# EAGLE board BMS Adapter Fuse Holder rev1 (EAGLE 9.2.2)
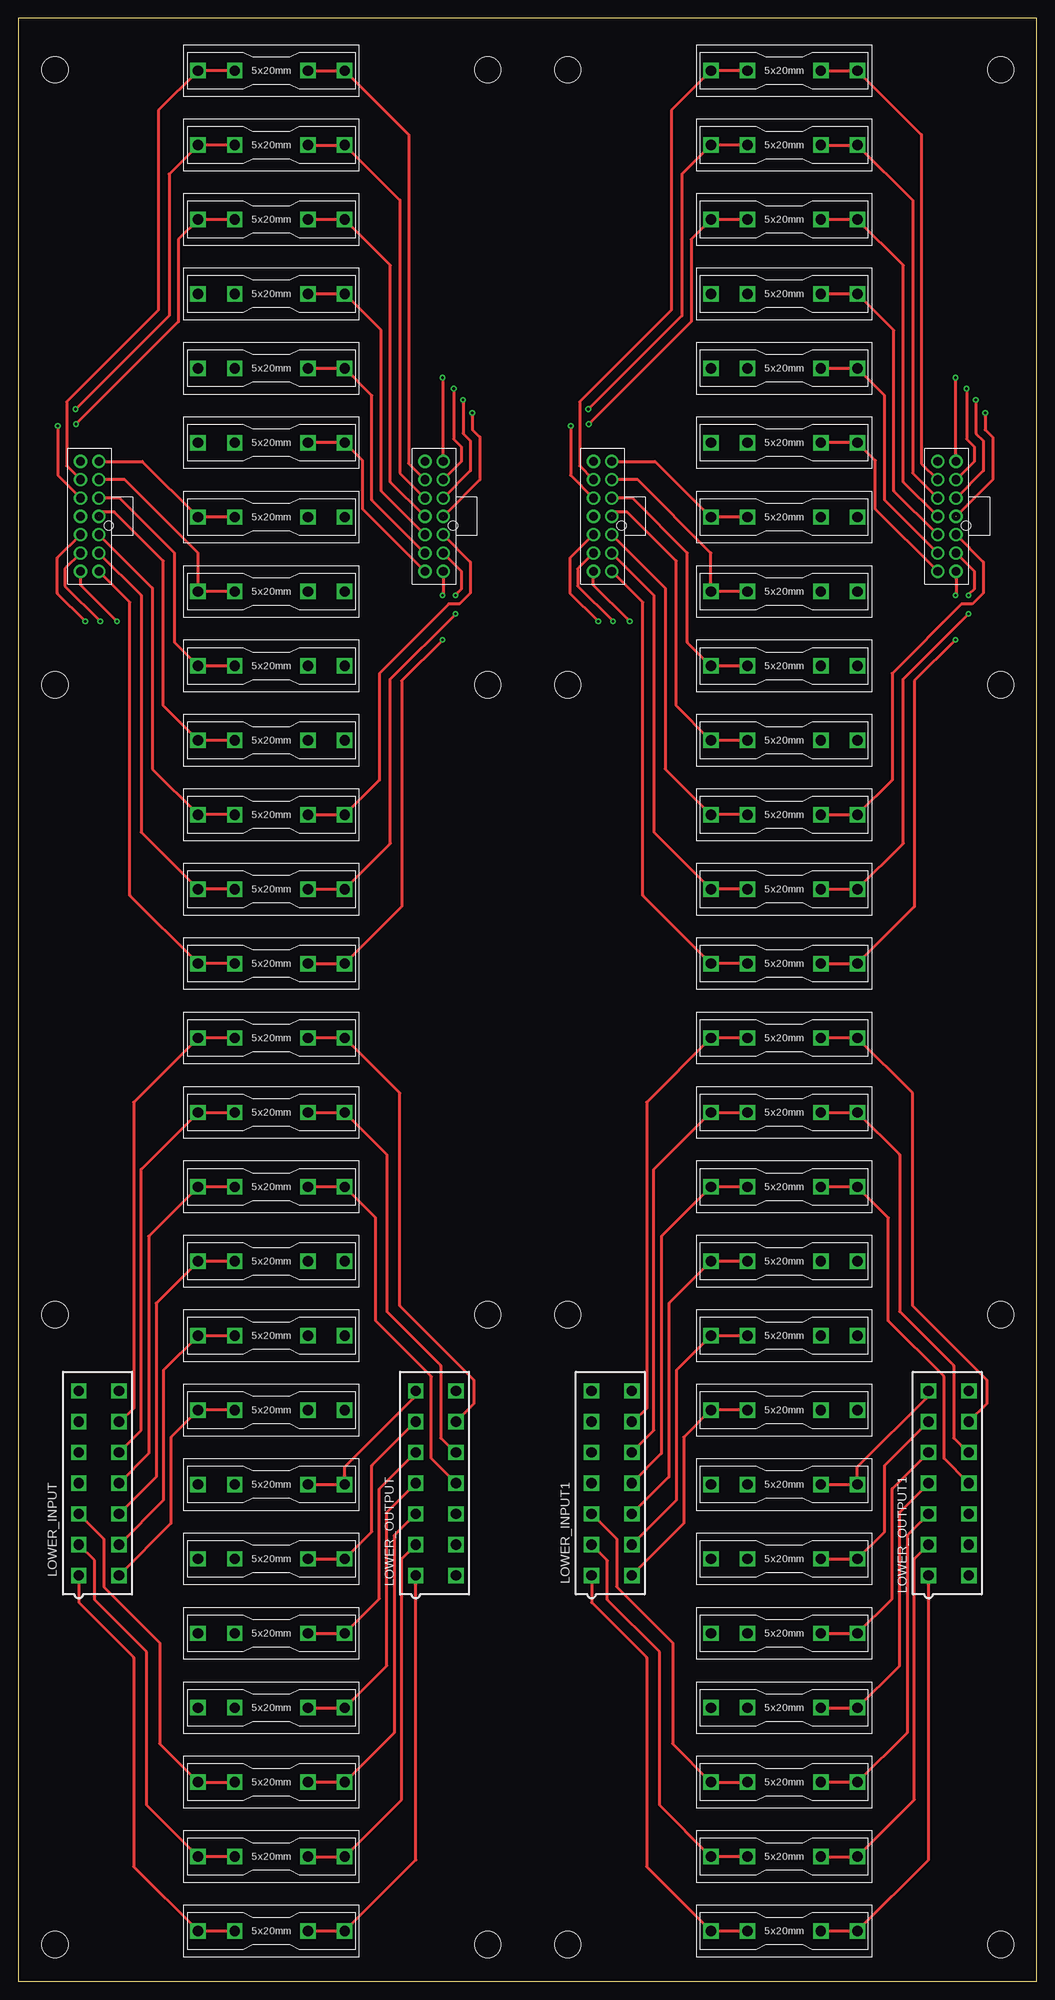
[diagram p0: board, top side]
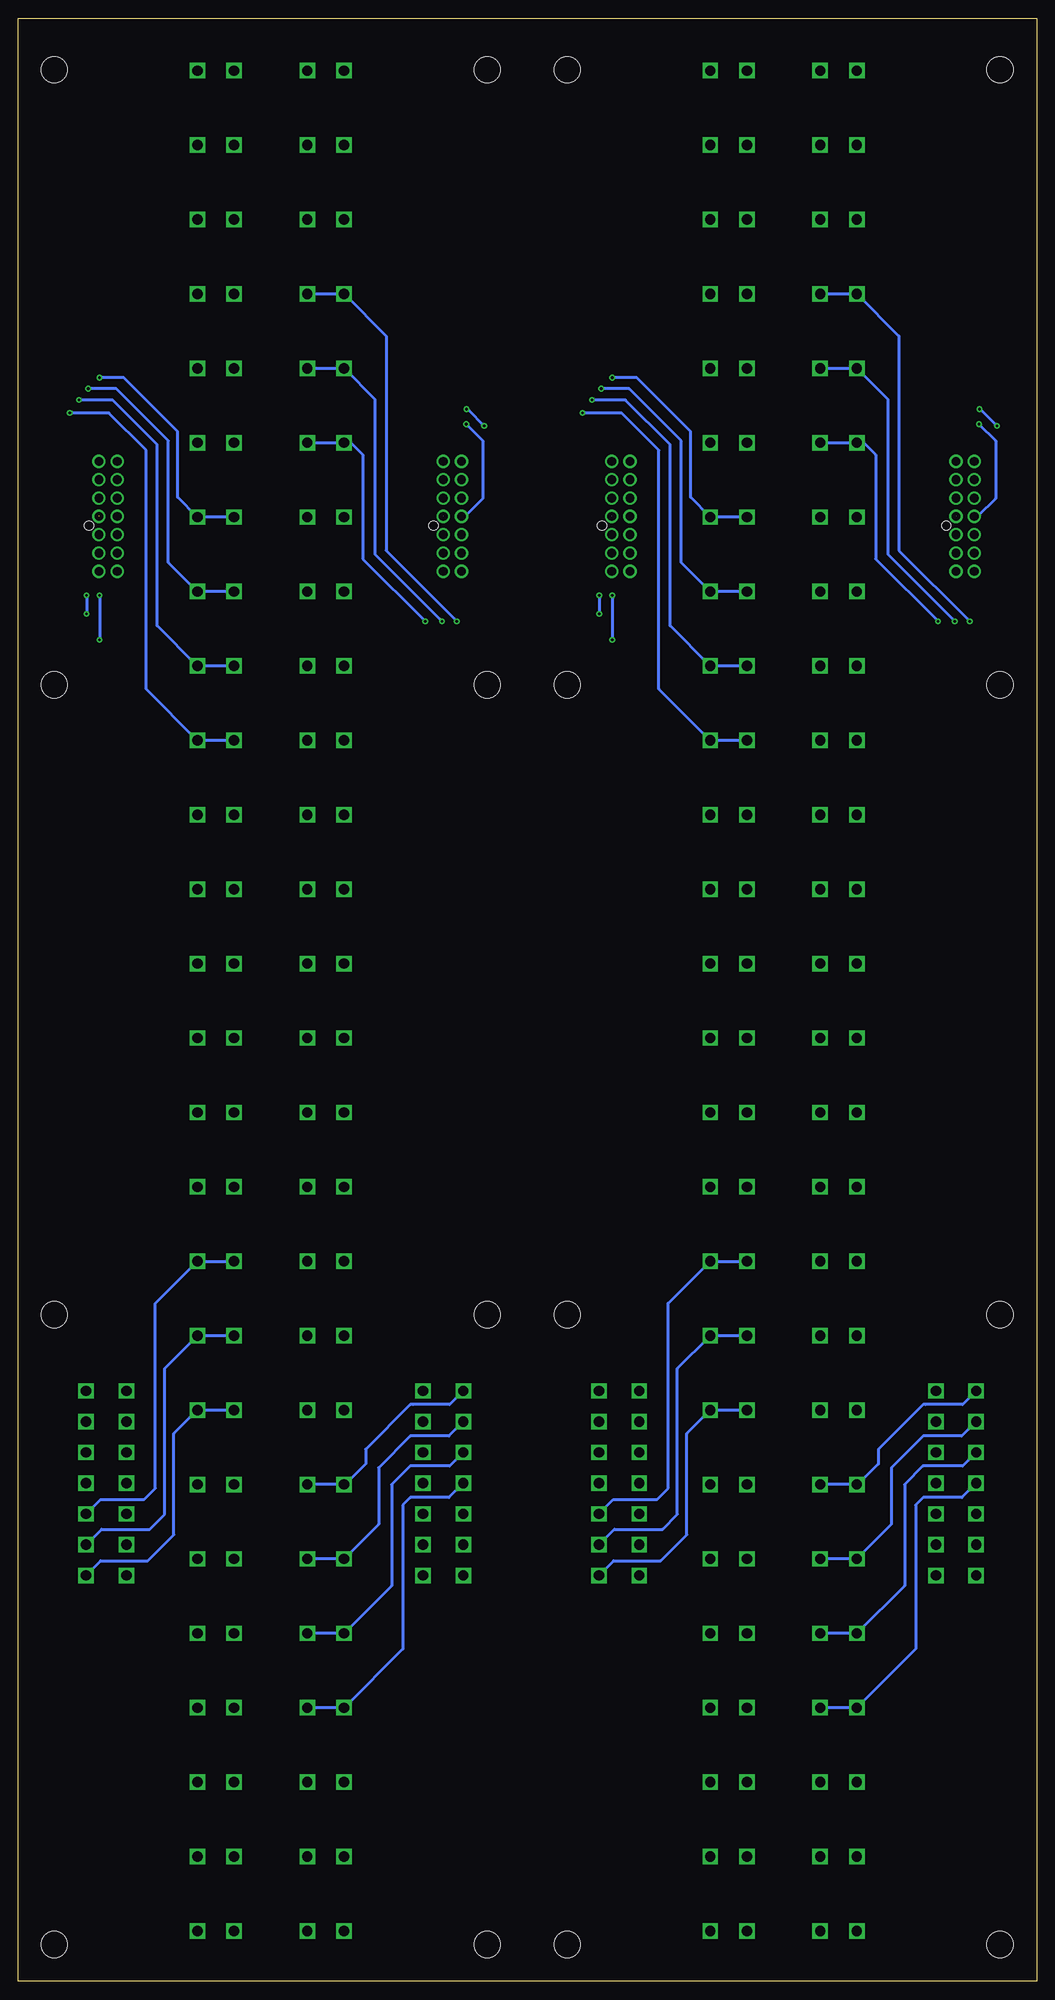
[diagram p1: board, bottom side, seen from below]

Size 139 x 268 mm. Coordinates in mm from the lower left corner, seen from the top.
Outline: 0,0 139,0 139,268 0,268 0,0
Copper layers (1*16): Top 0.035mm / dielectric 1.5mm / Bottom 0.035mm
Design rules "DRC Advanced Circuits *": minimum track width 6mil, minimum drill 15mil, track to track 24mil, track to pad 24mil, pad to pad 24mil, via to via 24mil, smd to smd 24mil, copper to edge 40mil, drill to drill 6mil, minimum pad ring 10mil, minimum via ring 8mil, stop-mask expansion 4mil, vias tented up to drill 0mil, thermal gap 10mil
Holes 3.6 mm at 5,261 64.09,261 5,5 64.09,177 64.09,91 64.09,5 5,91 5,177 75,261 134.09,261 75,5 134.09,177 134.09,91 134.09,5 75,91 75,177

## Footprints (pad centres in the part's own frame; a part is rotated, then mirrored left to right if it is on the bottom)
MINIFIT_5566-14 = drill 1.4 square: 1 12.6,-2.75; 2 8.4,-2.75; 3 4.2,-2.75; 4 0,-2.75; 5 -4.2,-2.75; 6 -8.4,-2.75; 7 -12.6,-2.75; 8 12.6,2.75; 9 8.4,2.75; 10 4.2,2.75; 11 0,2.75; 12 -4.2,2.75; 13 -8.4,2.75; 14 -12.6,2.75
0751.0110 = drill 1.4 square: L1 -10,0; L2 -5,0; R1 5,0; R2 10,0
NANO-FIT_VERTICAL-14 = drill 1.2: P$1 -7.5,0; P$2 -5,0; P$3 -2.5,0; P$4 0,0; P$5 2.5,0; P$6 5,0; P$7 7.5,0; P$8 -7.5,2.5; P$9 -5,2.5; P$10 -2.5,2.5; P$11 0,2.5; P$12 2.5,2.5; P$13 5,2.5; P$14 7.5,2.5 | hole 1.3: -1.27,-1.34

## Placement (x,y rotation side)
LOWER_INPUT  CONNECTOR-14  [MINIFIT_5566-14]  11,68 270 top
LOWER_INPUT1  CONNECTOR-14  [MINIFIT_5566-14]  81,68 270 top
LOWER_OUTPUT  CONNECTOR-14  [MINIFIT_5566-14]  57,68 270 top
LOWER_OUTPUT1  CONNECTOR-14  [MINIFIT_5566-14]  127,68 270 top
U$1  1A  [0751.0110]  34.54,6.86 180 top
U$2  1A  [0751.0110]  34.54,17.02 180 top
U$3  1A  [0751.0110]  34.54,27.18 180 top
U$4  1A  [0751.0110]  34.54,37.34 180 top
U$5  1A  [0751.0110]  34.54,47.5 180 top
U$6  1A  [0751.0110]  34.54,57.66 180 top
U$7  1A  [0751.0110]  34.54,67.82 180 top
U$8  1A  [0751.0110]  34.54,77.98 180 top
U$9  1A  [0751.0110]  34.54,88.14 180 top
U$10  1A  [0751.0110]  34.54,98.3 180 top
U$11  1A  [0751.0110]  34.54,108.46 180 top
U$12  1A  [0751.0110]  34.54,118.62 180 top
U$13  1A  [0751.0110]  34.54,128.78 180 top
U$14  1A  [0751.0110]  34.54,138.94 180 top
U$15  1A  [0751.0110]  34.54,149.1 180 top
U$16  1A  [0751.0110]  34.54,159.26 180 top
U$17  1A  [0751.0110]  34.54,169.42 180 top
U$18  1A  [0751.0110]  34.54,179.58 180 top
U$19  1A  [0751.0110]  34.54,189.74 180 top
U$20  1A  [0751.0110]  34.54,199.9 180 top
U$21  1A  [0751.0110]  34.54,210.06 180 top
U$22  1A  [0751.0110]  34.54,220.22 180 top
U$23  1A  [0751.0110]  34.54,230.38 180 top
U$24  1A  [0751.0110]  34.54,240.54 180 top
U$25  1A  [0751.0110]  34.54,250.7 180 top
U$26  1A  [0751.0110]  34.54,260.86 180 top
U$27  1A  [0751.0110]  104.54,6.86 180 top
U$28  1A  [0751.0110]  104.54,17.02 180 top
U$29  1A  [0751.0110]  104.54,27.18 180 top
U$30  1A  [0751.0110]  104.54,37.34 180 top
U$31  1A  [0751.0110]  104.54,47.5 180 top
U$32  1A  [0751.0110]  104.54,57.66 180 top
U$33  1A  [0751.0110]  104.54,67.82 180 top
U$34  1A  [0751.0110]  104.54,77.98 180 top
U$35  1A  [0751.0110]  104.54,88.14 180 top
U$36  1A  [0751.0110]  104.54,98.3 180 top
U$37  1A  [0751.0110]  104.54,108.46 180 top
U$38  1A  [0751.0110]  104.54,118.62 180 top
U$39  1A  [0751.0110]  104.54,128.78 180 top
U$40  1A  [0751.0110]  104.54,138.94 180 top
U$41  1A  [0751.0110]  104.54,149.1 180 top
U$42  1A  [0751.0110]  104.54,159.26 180 top
U$43  1A  [0751.0110]  104.54,169.42 180 top
U$44  1A  [0751.0110]  104.54,179.58 180 top
U$45  1A  [0751.0110]  104.54,189.74 180 top
U$46  1A  [0751.0110]  104.54,199.9 180 top
U$47  1A  [0751.0110]  104.54,210.06 180 top
U$48  1A  [0751.0110]  104.54,220.22 180 top
U$49  1A  [0751.0110]  104.54,230.38 180 top
U$50  1A  [0751.0110]  104.54,240.54 180 top
U$51  1A  [0751.0110]  104.54,250.7 180 top
U$52  1A  [0751.0110]  104.54,260.86 180 top
UPPER_INPUT  CONNECTOR-14NANO-FIT_VERTICAL-14  [NANO-FIT_VERTICAL-14]  11,200 90 top
UPPER_INPUT1  CONNECTOR-14NANO-FIT_VERTICAL-14  [NANO-FIT_VERTICAL-14]  81,200 90 top
UPPER_OUTPUT  CONNECTOR-14NANO-FIT_VERTICAL-14  [NANO-FIT_VERTICAL-14]  58,200 90 top
UPPER_OUTPUT1  CONNECTOR-14NANO-FIT_VERTICAL-14  [NANO-FIT_VERTICAL-14]  128,200 90 top

## Library data of the parts
LOWER_INPUT LOWER_INPUT1 LOWER_OUTPUT LOWER_OUTPUT1 U$1-U$52 UPPER_INPUT UPPER_INPUT1 UPPER_OUTPUT UPPER_OUTPUT1 = HyTechDevices

## Nets
N$1: LOWER_OUTPUT.1 U$1.L1 U$1.L2
N$2: LOWER_OUTPUT.2 U$2.L1 U$2.L2
N$3: LOWER_OUTPUT.3 U$3.L1 U$3.L2
N$4: LOWER_OUTPUT.4 U$4.L1 U$4.L2
N$5: LOWER_OUTPUT.5 U$5.L1 U$5.L2
N$6: LOWER_OUTPUT.6 U$6.L1 U$6.L2
N$7: LOWER_OUTPUT.7 U$7.L1 U$7.L2
N$8: LOWER_OUTPUT.8 U$8.L1 U$8.L2
N$9: LOWER_OUTPUT.9 U$9.L1 U$9.L2
N$10: LOWER_OUTPUT.10 U$10.L1 U$10.L2
N$11: LOWER_OUTPUT.11 U$11.L1 U$11.L2
N$12: LOWER_OUTPUT.12 U$12.L1 U$12.L2
N$13: LOWER_OUTPUT.13 U$13.L1 U$13.L2
N$14: U$14.L1 U$14.L2 UPPER_OUTPUT.P$1
N$15: U$15.L1 U$15.L2 UPPER_OUTPUT.P$2
N$16: U$16.L1 U$16.L2 UPPER_OUTPUT.P$3
N$17: U$17.L1 U$17.L2 UPPER_OUTPUT.P$4
N$18: U$18.L1 U$18.L2 UPPER_OUTPUT.P$5
N$19: U$19.L1 U$19.L2 UPPER_OUTPUT.P$6
N$20: U$20.L1 U$20.L2 UPPER_OUTPUT.P$7
N$21: U$21.L1 U$21.L2 UPPER_OUTPUT.P$8
N$23: U$22.L1 U$22.L2 UPPER_OUTPUT.P$9
N$24: U$23.L1 U$23.L2 UPPER_OUTPUT.P$10
N$25: U$24.L1 U$24.L2 UPPER_OUTPUT.P$11
N$26: U$25.L1 U$25.L2 UPPER_OUTPUT.P$12
N$27: U$26.L1 U$26.L2 UPPER_OUTPUT.P$13
N$28: LOWER_OUTPUT1.1 U$27.L1 U$27.L2
N$29: LOWER_INPUT.1 U$1.R1 U$1.R2
N$30: LOWER_INPUT.2 U$2.R1 U$2.R2
N$31: LOWER_INPUT.3 U$3.R1 U$3.R2
N$32: LOWER_INPUT.4 U$4.R1 U$4.R2
N$33: LOWER_INPUT.5 U$5.R1 U$5.R2
N$34: LOWER_INPUT.6 U$6.R1 U$6.R2
N$35: LOWER_INPUT.7 U$7.R1 U$7.R2
N$36: LOWER_INPUT.8 U$8.R1 U$8.R2
N$37: LOWER_INPUT.9 U$9.R1 U$9.R2
N$38: LOWER_INPUT.10 U$10.R1 U$10.R2
N$39: LOWER_INPUT.11 U$11.R1 U$11.R2
N$40: LOWER_INPUT.12 U$12.R1 U$12.R2
N$41: LOWER_INPUT.13 U$13.R1 U$13.R2
N$42: U$14.R1 U$14.R2 UPPER_INPUT.P$1
N$43: U$15.R1 U$15.R2 UPPER_INPUT.P$2
N$44: U$16.R1 U$16.R2 UPPER_INPUT.P$3
N$45: U$17.R1 U$17.R2 UPPER_INPUT.P$4
N$46: U$18.R1 U$18.R2 UPPER_INPUT.P$5
N$47: U$19.R1 U$19.R2 UPPER_INPUT.P$6
N$48: U$20.R1 U$20.R2 UPPER_INPUT.P$7
N$49: U$21.R1 U$21.R2 UPPER_INPUT.P$8
N$50: U$22.R1 U$22.R2 UPPER_INPUT.P$9
N$51: U$23.R1 U$23.R2 UPPER_INPUT.P$10
N$52: U$24.R1 U$24.R2 UPPER_INPUT.P$11
N$53: U$25.R1 U$25.R2 UPPER_INPUT.P$12
N$54: U$26.R1 U$26.R2 UPPER_INPUT.P$13
N$55: LOWER_OUTPUT1.2 U$28.L1 U$28.L2
N$56: LOWER_OUTPUT1.3 U$29.L1 U$29.L2
N$57: LOWER_OUTPUT1.4 U$30.L1 U$30.L2
N$58: LOWER_OUTPUT1.5 U$31.L1 U$31.L2
N$59: LOWER_OUTPUT1.6 U$32.L1 U$32.L2
N$60: LOWER_OUTPUT1.7 U$33.L1 U$33.L2
N$61: LOWER_OUTPUT1.8 U$34.L1 U$34.L2
N$62: LOWER_OUTPUT1.9 U$35.L1 U$35.L2
N$63: LOWER_OUTPUT1.10 U$36.L1 U$36.L2
N$64: LOWER_OUTPUT1.11 U$37.L1 U$37.L2
N$65: LOWER_OUTPUT1.12 U$38.L1 U$38.L2
N$66: LOWER_OUTPUT1.13 U$39.L1 U$39.L2
N$67: U$40.L1 U$40.L2 UPPER_OUTPUT1.P$1
N$68: U$41.L1 U$41.L2 UPPER_OUTPUT1.P$2
N$69: U$42.L1 U$42.L2 UPPER_OUTPUT1.P$3
N$70: U$43.L1 U$43.L2 UPPER_OUTPUT1.P$4
N$71: U$44.L1 U$44.L2 UPPER_OUTPUT1.P$5
N$72: U$45.L1 U$45.L2 UPPER_OUTPUT1.P$6
N$73: U$46.L1 U$46.L2 UPPER_OUTPUT1.P$7
N$74: U$47.L1 U$47.L2 UPPER_OUTPUT1.P$8
N$75: U$48.L1 U$48.L2 UPPER_OUTPUT1.P$9
N$76: U$49.L1 U$49.L2 UPPER_OUTPUT1.P$10
N$77: U$50.L1 U$50.L2 UPPER_OUTPUT1.P$11
N$78: U$51.L1 U$51.L2 UPPER_OUTPUT1.P$12
N$79: U$52.L1 U$52.L2 UPPER_OUTPUT1.P$13
N$80: LOWER_INPUT1.1 U$27.R1 U$27.R2
N$81: LOWER_INPUT1.2 U$28.R1 U$28.R2
N$82: LOWER_INPUT1.3 U$29.R1 U$29.R2
N$83: LOWER_INPUT1.4 U$30.R1 U$30.R2
N$84: LOWER_INPUT1.5 U$31.R1 U$31.R2
N$85: LOWER_INPUT1.6 U$32.R1 U$32.R2
N$86: LOWER_INPUT1.7 U$33.R1 U$33.R2
N$87: LOWER_INPUT1.8 U$34.R1 U$34.R2
N$88: LOWER_INPUT1.9 U$35.R1 U$35.R2
N$89: LOWER_INPUT1.10 U$36.R1 U$36.R2
N$90: LOWER_INPUT1.11 U$37.R1 U$37.R2
N$91: LOWER_INPUT1.12 U$38.R1 U$38.R2
N$92: LOWER_INPUT1.13 U$39.R1 U$39.R2
N$93: U$40.R1 U$40.R2 UPPER_INPUT1.P$1
N$94: U$41.R1 U$41.R2 UPPER_INPUT1.P$2
N$95: U$42.R1 U$42.R2 UPPER_INPUT1.P$3
N$96: U$43.R1 U$43.R2 UPPER_INPUT1.P$4
N$97: U$44.R1 U$44.R2 UPPER_INPUT1.P$5
N$98: U$45.R1 U$45.R2 UPPER_INPUT1.P$6
N$99: U$46.R1 U$46.R2 UPPER_INPUT1.P$7
N$100: U$47.R1 U$47.R2 UPPER_INPUT1.P$8
N$101: U$48.R1 U$48.R2 UPPER_INPUT1.P$9
N$102: U$49.R1 U$49.R2 UPPER_INPUT1.P$10
N$103: U$50.R1 U$50.R2 UPPER_INPUT1.P$11
N$104: U$51.R1 U$51.R2 UPPER_INPUT1.P$12
N$105: U$52.R1 U$52.R2 UPPER_INPUT1.P$13

## Tracks (layer width: path | path; a pad name or v marks a point on that pad's centre or on a via)
N$1
  Top 0.406: U$1.L2 U$1.L1 54.25,16.56 LOWER_OUTPUT.1
N$2
  Top 0.406: U$2.L2 U$2.L1 52.32,24.8 52.32,57.67 LOWER_OUTPUT.2
N$3
  Top 0.406: LOWER_OUTPUT.3 51.31,60.86 51.31,33.94 U$3.L1 U$3.L2
N$4
  Top 0.406: U$4.L2 U$4.L1 50.29,43.08 50.29,64.04 LOWER_OUTPUT.4
N$5
  Top 0.406: U$5.L2 U$5.L1 49.28,52.23 49.28,67.23 LOWER_OUTPUT.5
N$6
  Top 0.406: U$6.L2 U$6.L1 48.26,61.37 48.26,70.41 LOWER_OUTPUT.6
N$7
  Top 0.406: U$7.L2 U$7.L1 44.54,70.2 54.25,79.9 LOWER_OUTPUT.7
N$8
  Bottom 0.406: LOWER_OUTPUT.8 57.75,57.4 51.31,57.4 47.75,60.96 47.75,74.77 U$8.L1 U$8.L2
N$9
  Bottom 0.406: U$9.L2 U$9.L1 49.02,83.66 49.02,63.75 51.05,61.72 57.63,61.72 LOWER_OUTPUT.9
N$10
  Bottom 0.406: LOWER_OUTPUT.10 57.77,65.78 51.82,65.78 50.29,67.31 50.29,92.55 U$10.L1 U$10.L2
N$11
  Top 0.406: LOWER_OUTPUT.11 56.39,71.36 56.39,82.55 48.77,90.17 48.77,104.23 U$11.L1 U$11.L2
N$12
  Top 0.406: U$12.L2 U$12.L1 50.29,112.87 50.29,91.44 57.66,84.07 57.66,74.17 59.62,72.2 LOWER_OUTPUT.12
N$13
  Top 0.406: LOWER_OUTPUT.13 62.23,78.88 62.23,82.04 52.07,92.2 52.07,121.25 U$13.L1 U$13.L2
N$14  (via drill 0.38)
  Top 0.406: U$14.L2 U$14.L1 52.32,146.72 52.32,177.54 v57.91,183.13 | UPPER_OUTPUT.P$1 58,189.32 v57.91,189.23
  Bottom 0.406: v57.91,189.23 v57.91,183.13
N$15  (via drill 0.38)
  Top 0.406: U$15.L2 U$15.L1 50.8,155.35 50.8,177.8 v59.69,186.69 | UPPER_OUTPUT.P$2 60.45,192.55 60.45,190.06 59.69,189.3 v59.69,189.23
  Bottom 0.406: v59.69,189.23 v59.69,186.69
N$16
  Top 0.406: U$16.L2 U$16.L1 49.28,163.99 49.28,178.56 58.74,188.02 60.19,188.02 61.72,189.55 61.72,193.78 UPPER_OUTPUT.P$3
N$17  (via drill 0.38)  (1 unrouted)
  Top 0.406: v61.98,214.12 61.98,211.83 62.99,210.82 62.99,204.99 58.6,200.6 58.57,200.6 57.98,200.02
  Bottom 0.406: U$17.L2 U$17.L1 51.56,176.43 51.56,209.04 56.64,214.12 v61.98,214.12
N$18  (via drill 0.38)
  Top 0.406: v60.71,215.9 60.71,211.33 61.72,210.31 61.72,206.22 UPPER_OUTPUT.P$5
  Bottom 0.406: U$18.L2 U$18.L1 50.04,185.07 50.04,209.8 56.13,215.9 v60.71,215.9
N$19  (via drill 0.38)
  Top 0.406: v59.44,217.42 59.44,210.56 60.45,209.55 60.45,207.45 UPPER_OUTPUT.P$6
  Bottom 0.406: U$19.L2 U$19.L1 48.51,193.71 48.51,210.31 55.63,217.42 v59.44,217.42
N$20  (via drill 0.38)
  Top 0.406: v57.91,218.95 57.91,207.59 UPPER_OUTPUT.P$7
  Bottom 0.406: U$20.L2 U$20.L1 47.24,202.6 47.24,211.58 54.61,218.95 v57.91,218.95
N$21
  Top 0.406: UPPER_OUTPUT.P$8 46.99,201.01 46.99,207.61 U$21.L1 U$21.L2
N$23
  Top 0.406: UPPER_OUTPUT.P$9 48.26,202.24 48.26,216.5 U$22.L1 U$22.L2
N$24
  Top 0.406: UPPER_OUTPUT.P$10 49.53,203.47 49.53,225.39 U$23.L1 U$23.L2
N$25
  Top 0.406: UPPER_OUTPUT.P$11 50.8,204.7 50.8,234.28 U$24.L1 U$24.L2
N$26
  Top 0.406: U$25.L2 U$25.L1 52.07,243.17 52.07,205.93 UPPER_OUTPUT.P$12
N$27
  Top 0.406: U$26.L2 U$26.L1 53.28,252.12 53.28,207.22 UPPER_OUTPUT.P$13
N$28
  Top 0.406: U$27.L2 U$27.L1 124.25,16.56 LOWER_OUTPUT1.1
N$29
  Top 0.406: LOWER_INPUT.1 8.25,51.69 15.75,44.19 15.75,15.65 U$1.R2 U$1.R1
N$30
  Top 0.406: U$2.R1 U$2.R2 17.53,24.03 17.53,44.96 10.41,52.07 10.41,57.44 LOWER_INPUT.2
N$31
  Top 0.406: LOWER_INPUT.3 11.68,60.37 11.68,53.85 19.3,46.23 19.3,32.42 U$3.R2 U$3.R1
N$32
  Bottom 0.406: LOWER_INPUT.4 10.21,66.04 15.49,66.04 16.51,65.02 16.51,45.37 U$4.R2 U$4.R1
N$33
  Bottom 0.406: LOWER_INPUT.5 10.11,70.34 15.51,70.34 18.03,67.82 18.03,54.01 U$5.R2 U$5.R1
N$34
  Bottom 0.406: LOWER_INPUT.6 10.23,74.42 15.49,74.42 19.81,70.1 19.81,62.39 U$6.R2 U$6.R1
N$35
  Bottom 0.406: LOWER_INPUT.7 10.11,78.74 15.14,78.74 15.49,78.74 21.59,72.64 21.59,70.61 24.38,67.82 U$7.R2 U$7.R1
N$36
  Top 0.406: U$8.R1 U$8.R2 20.83,74.26 20.83,62.48 LOWER_INPUT.8
N$37
  Top 0.406: U$9.R1 U$9.R2 19.81,83.4 19.81,65.66 LOWER_INPUT.9
N$38
  Top 0.406: U$10.R1 U$10.R2 18.8,92.55 18.8,68.85 LOWER_INPUT.10
N$39
  Top 0.406: U$11.R1 U$11.R2 17.78,101.69 17.78,72.03 LOWER_INPUT.11
N$40
  Top 0.406: LOWER_INPUT.12 16.76,75.21 16.76,110.84 U$12.R2 U$12.R1
N$41
  Top 0.406: U$13.R1 U$13.R2 15.75,119.98 15.75,78.23 13.92,76.4 LOWER_INPUT.13
N$42
  Top 0.406: U$14.R1 U$14.R2 15.24,148.24 15.24,188.26 UPPER_INPUT.P$1
N$43
  Top 0.406: UPPER_INPUT.P$2 16.76,189.24 16.76,156.88 U$15.R2 U$15.R1
N$44
  Top 0.406: UPPER_INPUT.P$3 18.29,190.21 18.29,165.51 U$16.R2 U$16.R1
N$45  (1 unrouted)
  Top 0.406: U$17.R1 U$17.R2 19.81,174.15 19.81,193.9 13.11,200.6 11.57,200.6 10.98,200.02
N$46
  Top 0.406: U$18.R1 U$18.R2 21.34,182.78 21.34,195 13.84,202.5 UPPER_INPUT.P$5
N$47
  Top 0.406: U$19.R1 U$19.R2 24.54,195.01 14.56,205 UPPER_INPUT.P$6
N$48
  Top 0.406: UPPER_INPUT.P$7 16.94,207.5 U$20.R2 U$20.R1
N$49  (via drill 0.38)
  Top 0.406: v13.46,185.67 8.5,190.63 UPPER_INPUT.P$8
  Bottom 0.406: U$21.R1 U$21.R2 23.62,210.06 21.97,208.41 21.97,194.18 v13.46,185.67
N$50  (via drill 0.38)
  Top 0.406: UPPER_INPUT.P$9 6.35,192.85 6.35,190.5 v11.18,185.67
  Bottom 0.406: U$22.R1 U$22.R2 20.32,215.99 20.32,194.82 v11.18,185.67
N$51  (via drill 0.38)
  Top 0.406: v9.14,185.67 5.33,189.48 5.33,194.33 UPPER_INPUT.P$10
  Bottom 0.406: U$23.R1 U$23.R2 18.8,224.63 18.8,195.32 v9.14,185.67
N$52  (via drill 0.38)
  Top 0.406: U$24.R1 U$24.R2 21.84,237.84 21.84,226.57 v7.87,212.6
  Bottom 0.406: v7.87,212.6 5.59,210.31 5.59,202.44 8.02,200 UPPER_INPUT.P$11
N$53  (via drill 0.38)
  Top 0.406: v7.81,214.63 20.57,227.39 20.57,246.73 U$25.R2 U$25.R1 | v5.4,212.34 5.4,205.6 UPPER_INPUT.P$12
  Bottom 0.406: v7.81,214.63 7.68,214.63 v5.4,212.34
N$54
  Top 0.406: UPPER_INPUT.P$13 6.6,206.9 6.6,215.64 19.13,228.17 19.13,255.44 U$26.R2 U$26.R1
N$55
  Top 0.406: U$28.L2 U$28.L1 122.32,24.8 122.32,57.67 LOWER_OUTPUT1.2
N$56
  Top 0.406: LOWER_OUTPUT1.3 121.31,60.86 121.31,33.94 U$29.L1 U$29.L2
N$57
  Top 0.406: U$30.L2 U$30.L1 120.29,43.08 120.29,64.04 LOWER_OUTPUT1.4
N$58
  Top 0.406: U$31.L2 U$31.L1 119.28,52.23 119.28,67.23 LOWER_OUTPUT1.5
N$59
  Top 0.406: U$32.L2 U$32.L1 118.26,61.37 118.26,70.41 LOWER_OUTPUT1.6
N$60
  Top 0.406: U$33.L2 U$33.L1 114.54,70.2 124.25,79.9 LOWER_OUTPUT1.7
N$61
  Bottom 0.406: LOWER_OUTPUT1.8 127.75,57.4 121.31,57.4 117.75,60.96 117.75,74.77 U$34.L1 U$34.L2
N$62
  Bottom 0.406: U$35.L2 U$35.L1 119.02,83.66 119.02,63.75 121.05,61.72 127.63,61.72 LOWER_OUTPUT1.9
N$63
  Bottom 0.406: LOWER_OUTPUT1.10 127.77,65.78 121.82,65.78 120.29,67.31 120.29,92.55 U$36.L1 U$36.L2
N$64
  Top 0.406: LOWER_OUTPUT1.11 126.39,71.36 126.39,82.55 118.77,90.17 118.77,104.23 U$37.L1 U$37.L2
N$65
  Top 0.406: U$38.L2 U$38.L1 120.29,112.87 120.29,91.44 127.66,84.07 127.66,74.17 129.62,72.2 LOWER_OUTPUT1.12
N$66
  Top 0.406: LOWER_OUTPUT1.13 132.23,78.88 132.23,82.04 122.07,92.2 122.07,121.25 U$39.L1 U$39.L2
N$67  (via drill 0.38)
  Top 0.406: U$40.L2 U$40.L1 122.32,146.72 122.32,177.54 v127.91,183.13 | UPPER_OUTPUT1.P$1 128,189.32 v127.91,189.23
  Bottom 0.406: v127.91,189.23 v127.91,183.13
N$68  (via drill 0.38)
  Top 0.406: U$41.L2 U$41.L1 120.8,155.35 120.8,177.8 v129.69,186.69 | UPPER_OUTPUT1.P$2 130.45,192.55 130.45,190.06 129.69,189.3 v129.69,189.23
  Bottom 0.406: v129.69,189.23 v129.69,186.69
N$69
  Top 0.406: U$42.L2 U$42.L1 119.28,163.99 119.28,178.56 128.74,188.02 130.19,188.02 131.72,189.55 131.72,193.78 UPPER_OUTPUT1.P$3
N$70  (via drill 0.38)  (1 unrouted)
  Top 0.406: v131.98,214.12 131.98,211.83 132.99,210.82 132.99,204.99 128.6,200.6 128.57,200.6 127.98,200.02
  Bottom 0.406: U$43.L2 U$43.L1 121.56,176.43 121.56,209.04 126.64,214.12 v131.98,214.12
N$71  (via drill 0.38)
  Top 0.406: v130.71,215.9 130.71,211.33 131.72,210.31 131.72,206.22 UPPER_OUTPUT1.P$5
  Bottom 0.406: U$44.L2 U$44.L1 120.04,185.07 120.04,209.8 126.13,215.9 v130.71,215.9
N$72  (via drill 0.38)
  Top 0.406: v129.44,217.42 129.44,210.56 130.45,209.55 130.45,207.45 UPPER_OUTPUT1.P$6
  Bottom 0.406: U$45.L2 U$45.L1 118.51,193.71 118.51,210.31 125.63,217.42 v129.44,217.42
N$73  (via drill 0.38)
  Top 0.406: v127.91,218.95 127.91,207.59 UPPER_OUTPUT1.P$7
  Bottom 0.406: U$46.L2 U$46.L1 117.24,202.6 117.24,211.58 124.61,218.95 v127.91,218.95
N$74
  Top 0.406: UPPER_OUTPUT1.P$8 116.99,201.01 116.99,207.61 U$47.L1 U$47.L2
N$75
  Top 0.406: UPPER_OUTPUT1.P$9 118.26,202.24 118.26,216.5 U$48.L1 U$48.L2
N$76
  Top 0.406: UPPER_OUTPUT1.P$10 119.53,203.47 119.53,225.39 U$49.L1 U$49.L2
N$77
  Top 0.406: UPPER_OUTPUT1.P$11 120.8,204.7 120.8,234.28 U$50.L1 U$50.L2
N$78
  Top 0.406: U$51.L2 U$51.L1 122.07,243.17 122.07,205.93 UPPER_OUTPUT1.P$12
N$79
  Top 0.406: U$52.L2 U$52.L1 123.28,252.12 123.28,207.22 UPPER_OUTPUT1.P$13
N$80
  Top 0.406: LOWER_INPUT1.1 78.25,51.69 85.75,44.19 85.75,15.65 U$27.R2 U$27.R1
N$81
  Top 0.406: U$28.R1 U$28.R2 87.53,24.03 87.53,44.96 80.41,52.07 80.41,57.44 LOWER_INPUT1.2
N$82
  Top 0.406: LOWER_INPUT1.3 81.68,60.37 81.68,53.85 89.3,46.23 89.3,32.42 U$29.R2 U$29.R1
N$83
  Bottom 0.406: LOWER_INPUT1.4 80.21,66.04 85.49,66.04 86.51,65.02 86.51,45.37 U$30.R2 U$30.R1
N$84
  Bottom 0.406: LOWER_INPUT1.5 80.11,70.34 85.51,70.34 88.03,67.82 88.03,54.01 U$31.R2 U$31.R1
N$85
  Bottom 0.406: LOWER_INPUT1.6 80.23,74.42 85.49,74.42 89.81,70.1 89.81,62.39 U$32.R2 U$32.R1
N$86
  Bottom 0.406: LOWER_INPUT1.7 80.11,78.74 85.14,78.74 85.49,78.74 91.59,72.64 91.59,70.61 94.38,67.82 U$33.R2 U$33.R1
N$87
  Top 0.406: U$34.R1 U$34.R2 90.83,74.26 90.83,62.48 LOWER_INPUT1.8
N$88
  Top 0.406: U$35.R1 U$35.R2 89.81,83.4 89.81,65.66 LOWER_INPUT1.9
N$89
  Top 0.406: U$36.R1 U$36.R2 88.8,92.55 88.8,68.85 LOWER_INPUT1.10
N$90
  Top 0.406: U$37.R1 U$37.R2 87.78,101.69 87.78,72.03 LOWER_INPUT1.11
N$91
  Top 0.406: LOWER_INPUT1.12 86.76,75.21 86.76,110.84 U$38.R2 U$38.R1
N$92
  Top 0.406: U$39.R1 U$39.R2 85.75,119.98 85.75,78.23 83.92,76.4 LOWER_INPUT1.13
N$93
  Top 0.406: U$40.R1 U$40.R2 85.24,148.24 85.24,188.26 UPPER_INPUT1.P$1
N$94
  Top 0.406: UPPER_INPUT1.P$2 86.76,189.24 86.76,156.88 U$41.R2 U$41.R1
N$95
  Top 0.406: UPPER_INPUT1.P$3 88.29,190.21 88.29,165.51 U$42.R2 U$42.R1
N$96  (1 unrouted)
  Top 0.406: U$43.R1 U$43.R2 89.81,174.15 89.81,193.9 83.11,200.6 81.57,200.6 80.98,200.02
N$97
  Top 0.406: U$44.R1 U$44.R2 91.34,182.78 91.34,195 83.84,202.5 UPPER_INPUT1.P$5
N$98
  Top 0.406: U$45.R1 U$45.R2 94.54,195.01 84.56,205 UPPER_INPUT1.P$6
N$99
  Top 0.406: UPPER_INPUT1.P$7 86.94,207.5 U$46.R2 U$46.R1
N$100  (via drill 0.38)
  Top 0.406: v83.46,185.67 78.5,190.63 UPPER_INPUT1.P$8
  Bottom 0.406: U$47.R1 U$47.R2 93.62,210.06 91.97,208.41 91.97,194.18 v83.46,185.67
N$101  (via drill 0.38)
  Top 0.406: UPPER_INPUT1.P$9 76.35,192.85 76.35,190.5 v81.18,185.67
  Bottom 0.406: U$48.R1 U$48.R2 90.32,215.99 90.32,194.82 v81.18,185.67
N$102  (via drill 0.38)
  Top 0.406: v79.14,185.67 75.33,189.48 75.33,194.33 UPPER_INPUT1.P$10
  Bottom 0.406: U$49.R1 U$49.R2 88.8,224.63 88.8,195.32 v79.14,185.67
N$103  (via drill 0.38)
  Top 0.406: U$50.R1 U$50.R2 91.84,237.84 91.84,226.57 v77.87,212.6
  Bottom 0.406: v77.87,212.6 75.59,210.31 75.59,202.44 78.02,200 UPPER_INPUT1.P$11
N$104  (via drill 0.38)
  Top 0.406: v77.81,214.63 90.57,227.39 90.57,246.73 U$51.R2 U$51.R1 | v75.4,212.34 75.4,205.6 UPPER_INPUT1.P$12
  Bottom 0.406: v77.81,214.63 77.68,214.63 v75.4,212.34
N$105
  Top 0.406: UPPER_INPUT1.P$13 76.6,206.9 76.6,215.64 89.13,228.17 89.13,255.44 U$52.R2 U$52.R1

## Text on the board
tDocu: UPPER C12 | UPPER C12 | UPPER C11 | UPPER C11 | UPPER C10 | UPPER C10 | UPPER C9 | UPPER C9 | UPPER C8 | UPPER C8 | UPPER C7 | UPPER C7 | In | Out | In | Out | UPPER C6 | UPPER C6 | DANGER HIGH VOLTAGE | DANGER HIGH VOLTAGE | DANGER HIGH VOLTAGE | DANGER HIGH VOLTAGE | UPPER C5 | UPPER C5 | UPPER C4 | UPPER C4 | UPPER C3 | UPPER C3 | UPPER C2 | UPPER C2 | UPPER C1 | UPPER C1 | UPPER C0 | UPPER C0 | BMS Adapter Fuse Holder 2019 rev1 | BMS Adapter Fuse Holder 2019 rev1 | LOWER C12 | LOWER C12 | LOWER C11 | LOWER C11 | LOWER C10 | LOWER C10 | LOWER C9 | LOWER C9 | LOWER C8 | LOWER C8 | In | Out | In | Out | LOWER C7 | LOWER C7 | LOWER C6 | LOWER C6 | DANGER HIGH VOLTAGE | DANGER HIGH VOLTAGE | DANGER HIGH VOLTAGE | DANGER HIGH VOLTAGE | LOWER C5 | LOWER C5 | LOWER C4 | LOWER C4 | LOWER C3 | LOWER C3 | LOWER C2 | LOWER C2 | LOWER C1 | LOWER C1 | LOWER C0 | LOWER C0
bDocu: DANGER HIGH VOLTAGE | DANGER HIGH VOLTAGE | DANGER HIGH VOLTAGE | DANGER HIGH VOLTAGE | BMS Adapter Fuse Holder 2019 rev1 | BMS Adapter Fuse Holder 2019 rev1 | DANGER HIGH VOLTAGE | DANGER HIGH VOLTAGE | DANGER HIGH VOLTAGE | DANGER HIGH VOLTAGE